# Altium PCB SWG.PcbDoc
Units mm, origin at the board's own origin, x right, y up, seen from the top; angles counter-clockwise.
Board outline 108 x 53 mm, 2 copper layers (Top Layer, Bottom Layer), stack 1.536 mm thick; 36 components, 22 nets, 115 pads, 34 vias.
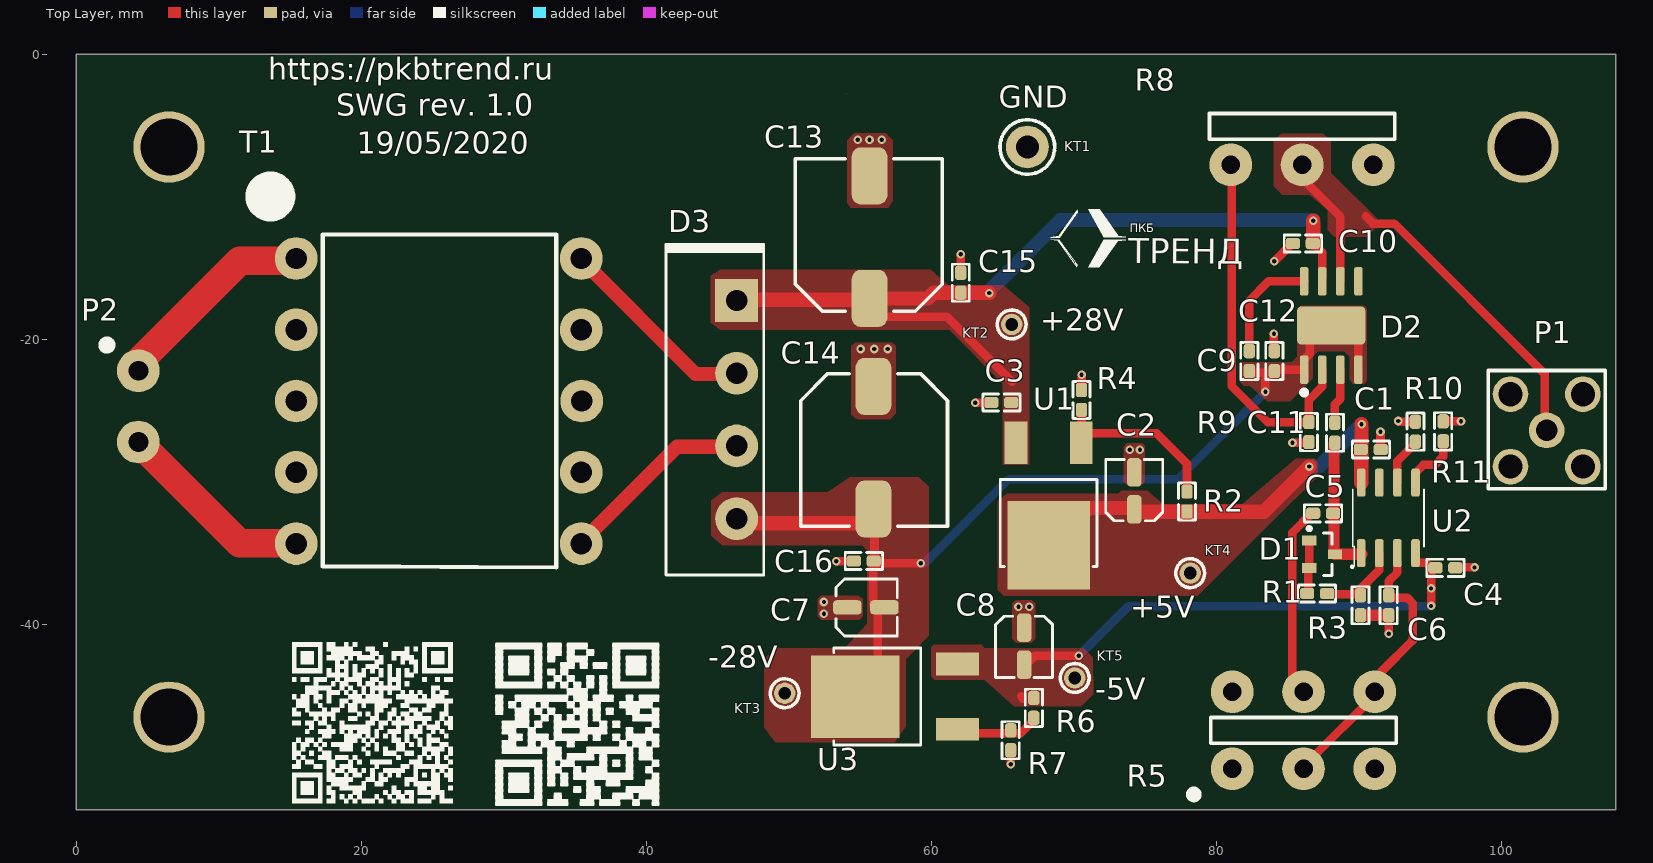
[diagram p0: Top Layer view]
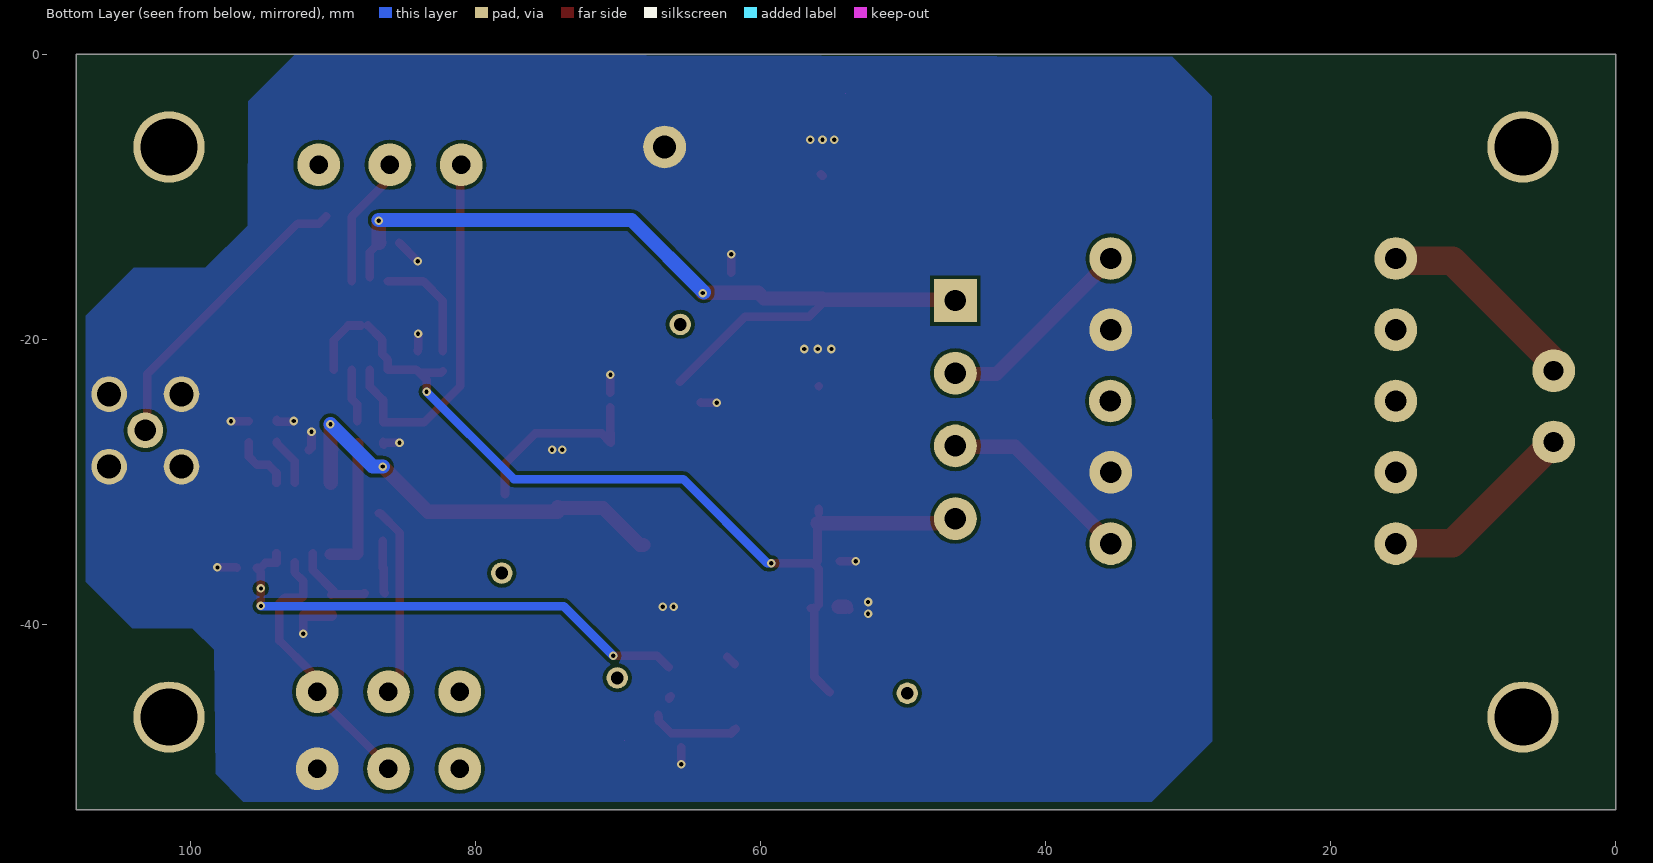
[diagram p1: Bottom Layer view, seen from below]
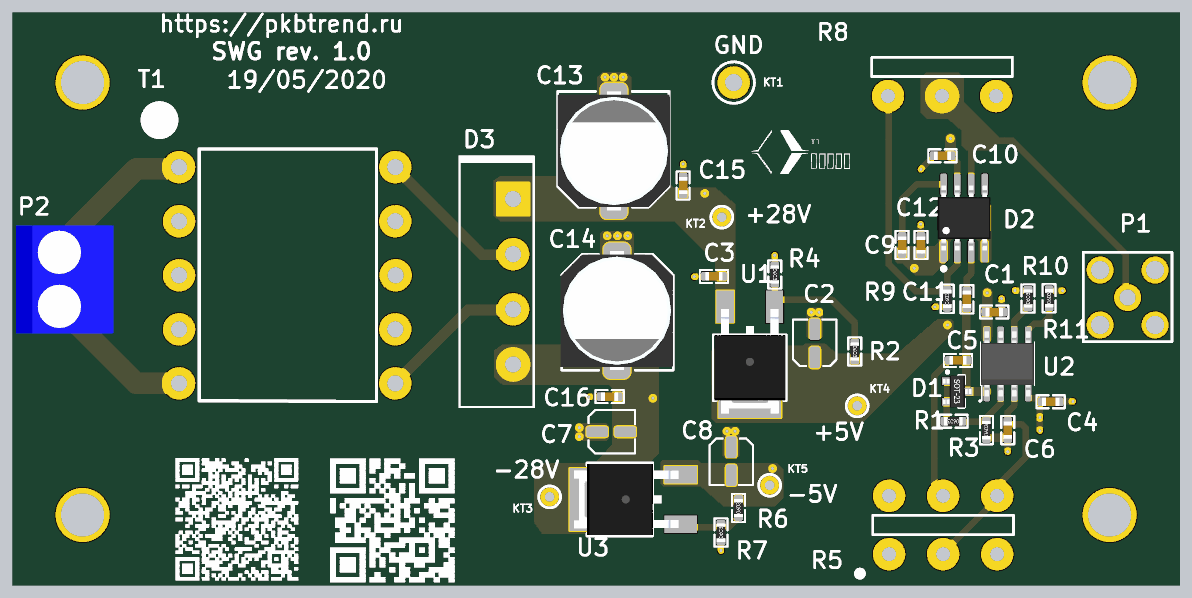
[diagram p2: 3D render of the assembled board from above, using the file's embedded part models]

## Layer stack, top to bottom
Top Solder: solder mask 0.0102, Solder Resist, Dk 3.5
Top Layer: signal copper 0.018
Dielectric 1: dielectric 1.5, FR-4, Dk 4.8
Bottom Layer: signal copper 0.018
Bottom Solder: solder mask 0.0102, Solder Resist, Dk 3.5

## Board outline
108,0 108,-53 0,-53 0,0
cut-out: 54.05,-2.725
cut-out: 69.525,-48.125
cut-out: 129.3,3.9
cut-out: 129.3,3.9
cut-out: 23.3,-66.7

## Design rules (kind name [scope] priority, off if disabled: settings)
Clearance [All] p1: gap=0.254 ignorepadtopadclearanceinfootprint=FALSE
Height [All] p1: minheight=0 maxheight=30 prefheight=12.7
PolygonConnect [All] p1: connectstyle=Direct reliefconductorwidth=0.254 reliefentries=4 polygonreliefangle="90 Angle" airgapwidth=0.254
RoutingVias [All] p1: holewidth=0.3 width=0.6 viastyle="Through Hole" minholewidth=0.3 minwidth=0.6 maxholewidth=0.5 maxwidth=1
SolderMaskExpansion [All] p1: expansion=0.102
Width Width_D3_3 [All] p1: maxlimit=2 minlimit=0.254 preferedwidth=2
Width Width_D3_2 [All] p2: maxlimit=2 minlimit=0.254 preferedwidth=2
Width Width_P2_2 [All] p3: maxlimit=2 minlimit=0.254 preferedwidth=2
Width Width_P2_1 [All] p4: maxlimit=2 minlimit=0.254 preferedwidth=2
Width Width_GND [All] p5: maxlimit=1 minlimit=0.254 preferedwidth=0.6
Width Width_-28 [All] p6: maxlimit=1 minlimit=0.254 preferedwidth=1
Width Width_220VAC [InNet('NetP1_1')] p7: maxlimit=1 minlimit=0.254 preferedwidth=1
Width Width_30VAC [InNet('NetD2_2')] p8: maxlimit=1 minlimit=0.254 preferedwidth=1
Width Width_+28 [InNet('+28V')] p9: maxlimit=1 minlimit=0.254 preferedwidth=1
Width [All] p10: maxlimit=0.6 minlimit=0.254 preferedwidth=0.6
29 further rules are at their usual default settings.

## Components (designator, comment, footprint, x,y, rotation, side; value= is the part's Value field where it differs from the comment)
C1 "0.1uF/50V" C0603 90.825,-27.725 r0 top
C2 "1uF/50V" UCHEMI-CON_CAP0404_RAD 74.225,-30.625 r90 top
C3 "0.1uF/50V" C0603 64.9,-24.425 r0 top
C4 "0.1uF/50V" C0603 96.05,-36.025 r0 top
C5 "0.1uF/50V" C0603 87.475,-32.2 r0 top
C6 "0.1uF/50V" C0603 92.075,-38.65 r90 top
C7 "1uF/50V" UCHEMI-CON_CAP0404_RAD 55.4,-38.8 r0 top
C8 "1uF/50V" UCHEMI-CON_CAP0404_RAD 66.5,-41.525 r270 top
C9 "30pF/50V" C0603 82.3,-21.525 r270 top
C10 "0.1uF/50V" C0603 86.05,-13.275 r180 top
C11 "?F/?V" C0603 88.3,-26.55 r90 top
C12 "0.1uF/50V" C0603 84.05,-21.525 r90 top
C13 "330uF/35V" UCHEMI-CON_CAP1010_RAD 55.65,-12.825 r90 top
C14 "330uF/35V" UCHEMI-CON_CAP1010_RAD 55.925,-27.6 r270 top
C15 "0.1uF/50V" C0603 62.05,-16.025 r90 top
C16 "0.1uF/50V" C0603 55.25,-35.55 r0 top
D1 "BAT54S-E3-08" SOT23-3L 87.4,-35.075 r0 top
D2 "OPA454AIDDA" TI_8SOICPAD 88.045,-19.025 r90 top
D3 "KBU810" KBU8 46.325,-32.575 r90 top
P1 "HYR-1141" SMA 103.16,-26.385 r90 top
P2 "DG300-5.0-02P-12" DG300-5.0-02P-12 4.35,-24.7 r270 top
R1 "2K" R0603 87.05,-37.825 r180 top
R2 "240" R0603 77.925,-31.375 r270 top
R3 "1.2K" R0603 90.1,-38.65 r90 top
R4 "732" R0603 70.525,-24.25 r270 top
R5 "5K" RES_Adj_duble_5K 86.1,-47.425 r0 top
R6 "120" R0603 67.175,-45.85 r90 top
R7 "360" R0603 65.55,-48.125 r90 top
R8 "10K" RES_Adj_10K 86,-5.05 r0 top
R9 "820" R0603 86.475,-26.5 r90 top
R10 "0" R0603 93.95,-26.475 r90 top
R11 "0" R0603 95.9,-26.45 r90 top
T1 "ТПГ-2(2х30В)" "ТПГ-2 (2x30)" 25.425,-24.325 r270 top
U1 "LM317AMDTX/NOPB" SC_TO-252A 68.219,-34.43 r90 top
U2 "AD8092ARZ" AD_SOIC-8_R-8_Rev4 92.05,-32.525 r0 top
U3 "LM337KVURG3" SC_TO-252A 54.64,-45.061 r0 top

## Footprints (in the part's own frame and the unit in brackets; to place one, negate y for a bottom-side part, rotate by r counter-clockwise, add the part's x,y. Pads: shape width x height; smd on the part's side, far side on the other; paste and mask are expansions set on the pad)
AD_SOIC-8_R-8_Rev4 [mm] "Small Outline IC (SOIC), 1.27 mm pitch; 8 pin, 4.90 mm L X 3.90 mm W X 1.75 mm H body"
  rrect50% 0.6x1.97 smd mask+0.05: 1(-1.905,-2.475) 2(-0.635,-2.475) 3(0.635,-2.475) 4(1.905,-2.475) 5(1.905,2.475) 6(0.635,2.475) 7(-0.635,2.475) 8(-1.905,2.475)
  silkscreen extent -2.61,-3.5 2.5,2, body extent -2.45,-3 2.45,3, height 1.75
C0603 [mm] "CHIP Capacitor, 1.6X0.8mm, 0603"
  rrect50% 1x0.8 smd mask+0.075: 1(-0.7,0) 2(0.7,0)
  silkscreen extent -1.33,-0.6 1.32,0.6, body extent -0.8,-0.4 0.8,0.4, height 0.9
DG300-5.0-02P-12 [mm]
  round 3 hole 1.4: 1(-2.5,0) 2(2.5,0)
  silkscreen extent -4.5,-2.4 -4.1,-2, body extent -5,-4 5,5, height 12.6
KBU8 [mm] "KBU8xx diode bridge rectifier"
  rect 3x3 hole 1.5: 1(15.3,0)
  round 3 hole 1.5: 2(10.2,0) 3(5.1,0) 4(0,0)
  silkscreen extent -3.95,-1.9 19.25,4.95, body extent -3.95,-1.9 19.25,4.95, height 17.3
R0603 [mm] "CHIP Resistor 1/10 WATT, 1.6x0.8mm, 0603, 1608"
  rrect50% 1x0.8 smd mask+0.05: 1(-0.7,0) 2(0.7,0)
  silkscreen extent -1.32,-0.6 1.32,0.6, body extent -0.85,-0.4 0.85,0.4, height 0.56
RES_Adj_10K [mm]
  round 3 hole 1.3: 1(-5,-2.7) 2(0,-2.7) 3(5,-2.7)
  silkscreen extent -6.5,-0.9 6.5,0.9, body extent -8.1,-5 8.1,10.6, height 22.2
RES_Adj_duble_5K [mm]
  round 3 hole 1.3: 1(-5,-2.7) 2(0,-2.7) 3(5,-2.7) 4(5,2.7) 5(0,2.7) 6(-5,2.7)
  silkscreen extent -7.9,-4.7 6.5,0.9, body extent -8.4,-11.2 8.4,5.3, height 22.2
SC_TO-252A [mm] "D-PAK"
  rect 3x1.6 smd: 1(7.18,-2.286) 3(7.18,2.286)
  rect 6.2x5.8 smd: 2(0,0)
  silkscreen extent -1.5,-3.4 4.6,3.4, body extent -2.7,-3.29 7,3.29, height 2.3
SMA [mm]
  round 2.5 hole 1.5: 1(0,0)
  round 2.5 hole 1.7: 2(-2.54,-2.54) 2(-2.54,2.54) 2(2.54,-2.54) 2(2.54,2.54)
  silkscreen extent -4.1,-4.1 4.2,4.1
SOT23-3L [mm] "SOT23, 3-Leads, Body 2.9x1.3mm, Pitch 0.95mm, Lead Span 2.5mm, IPC High Density"
  rect 1x0.7 smd: 1(-0.9,0.95) 2(-0.9,-0.95) 3(0.9,0)
  silkscreen extent -1.02,-1.5 0.7,1.92, body extent -1.32,-1.5 1.32,1.5, height 1.08
TI_8SOICPAD [mm]
  rrect50% 2x0.6 smd: 1(-3.1,1.905) 2(-3.1,0.635) 3(-3.1,-0.635) 4(-3.1,-1.905) 5(3.1,-1.905) 6(3.1,-0.635) 7(3.1,0.635) 8(3.1,1.905)
  rrect25% 2.7x4.8 smd: 9(0,0)
  silkscreen extent -4.8,1.8 -4.6,2, body extent -3,-2.45 3,2.45, height 1.75
UCHEMI-CON_CAP0404_RAD [mm]
  rrect50% 2x1 smd: 1(-1.3,0) 2(1.3,0)
  silkscreen extent -2.1,-2 2.2,2, body extent -2.4,-2.2 2.4,2.2, height 5.4
UCHEMI-CON_CAP1010_RAD [mm]
  rrect50% 4x2.5 smd: 1(-4.3,0) 2(4.3,0)
  silkscreen extent -5.2,-5.1 5.5,5.2, body extent -5.5,-5.2 5.5,5.2, height 10.41
"ТПГ-2 (2x30)" [mm]
  round 3 hole 1.5: 1(-10,-10) 2(-5,-10) 3(0,-10) 4(5,-10) 5(10,-10) 6(10,10) 7(5,10) 8(0,10.033) 9(-5,10) 10(-10,10)
  silkscreen extent -14.85,-12.31 11.68,8.26, body extent -16.26,-13.78 16.26,13.78, height 30

## Part data
C1 C3 C4 C6: library part CAP_0603_0.1uF/50V, Manufacturer="Murata Manufacturing", Package=0603, PartNumber=GRM188R71H104KA93D
  C1: N_GROUP=CAP
  C3 C4 C6: Group=CAP
C2 C7 C8: library part CAP_electrolit_1uf, Manufacturer=JB, PartNumber=JCK1H010M040054, Group=CAP
C5 C10 C12 C15 C16: library part CAP_0603_0.1F/50V, Manufacturer="Murata Manufacturing", Package=0603, PartNumber=GRM188R71H104KA93D, Group=CAP
C9: library part CAP_0603_30pF/50V, Manufacturer="Murata Manufacturing", Package=0603, PartNumber=GRM2165C1H300JZ01D, N_GROUP=CAP
C11: library part CAP_0603_?F/?V, Manufacturer="Murata Manufacturing", Package=0603, PartNumber=?, Group=CAP
C13 C14: library part CAP_electrolit_330uf, Manufacturer=JB, PartNumber=JCK1V331M100105, Group=CAP
D1: library part "Diode BAT54S", "Dual Schottky Rectifier, SOT-23, 30V 200mA", Manufacturer=Vishay, Package=SOT23, ComponentLink1Description="Manufacturer Link", ComponentLink1URL=http://www.irf.com/, ComponentLink2Description=Datasheet, ComponentLink2URL=http://www.irf.com/product-info/datasheets/data/10tq.pdf, Group=DIOD, PartNumber=BAT54S-E3-08
D2: library part CH_OPA454AIDDA, "IC OPAMP GP 1 CIRCUIT 8SOPWRPAD", Manufacturer="Texas Instruments", Group=CH, PartNumber=OPA454AIDDA
D3: "KBU8 series bridge single-phase rectifier, 8А, 1000V", Manufacturer=China, PartNumber=KBU810
P1: library part SMA, Manufacturer="New Centress (HOYUTEC)", Group=CON, PartNumber=HYR-1141
P2: Manufacturer="Degson Electronics", Group=CON, PartNumber=DG300-5.0-02P-12
R1: library part RES_0603_2K, Manufacturer=Yageo, Package=0603, PartNumber=RC0603FR-0744K2L, Group=RES
R2: library part RES_0402_240, "RES SMD 240 OHM 1% 1/10W 0603", Manufacturer="Panasonic Electronic Components", Package=0603, PartNumber=ERJ-3EKF2400V, Tolerance=±1%, Group=RES
R3: library part RES_0603_1.2K, Manufacturer=Yageo, Package=0603, PartNumber=RC0603FR-071K2L, Group=RES
R4: library part RES_0402_732, "RES SMD 732 OHM 1% 1/10W 0603", Manufacturer="Panasonic Electronic Components", Package=0603, PartNumber=ERJ-3EKF7320V, Tolerance=±1%, Group=RES
R5: library part RES_Adj_duble_5K, "Dual variable resistor WH148-2, resistance nominal 5kom. Metal handle with a recess for the cap.", Manufacturer=China, PartNumber=WH148-2, Group=RES
R6: library part RES_0402, Manufacturer="Panasonic Electronic Components Panasonic Electronic Components", Package=0603, PartNumber=ERJ-2RKF1200X, Tolerance=±1%, Group=RES, RoHS="ROHS3 Compliant"
R7: library part RES_0402, "RES SMD 360 OHM 1% 1/10W 0603", Manufacturer="Panasonic Electronic Components", Package=0603, PartNumber=ERJ-3EKF3600V, Tolerance=±1%, Group=RES
R8: library part Res_Adj_10K, "Variable Resistor", Manufacturer=China, PartNumber=16K1-10C10K,L15KC, Group=RES
R9: library part RES_0603_820, Manufacturer=Yageo, Package=0603, PartNumber=RC0603FR-07820RL, Group=RES
R10 R11: library part RES_0603_0, Manufacturer=Yageo, Package=0603, PartNumber=RC0603JR-070RL, Group=RES
T1: library part "ТПГ-2 (2x30)", "Sealed transformer", Manufacturer=Комплекс, PartNumber=ТПГ-2(2х30В)
U1: "3-Terminal Adjustable Regulator", Manufacturer="Texas Instruments", Package=TO-252A, ComponentLink1Description="LM317 Datasheet", ComponentLink1URL=http://www.national.com/ds/LM/LM317.pdf, ComponentLink2Description="LM317 Web Page", ComponentLink2URL=http://www.national.com/pf/LM/LM317.html, ComponentLink3Description="T03B Package Page", ComponentLink3URL=http://www.national.com/packaging/folders/t03b.html, PartNumber=LM317AMDTX/NOPB
U2: library part AD8092ARZ_1, Manufacturer="Analog Devices", Group=CH, PartNumber=AD8092ARZ
U3: "3-Terminal Adjustable Negative Regulator", Manufacturer="Texas Instruments", Package=TO-252A, ComponentLink1Description="LM337 Datasheet", ComponentLink1URL=http://www.national.com/ds/LM/LM337.pdf, ComponentLink2Description="LM337 Web Page", ComponentLink2URL=http://www.national.com/pf/LM/LM337.html, ComponentLink3Description="T03B Package Page", ComponentLink3URL=http://www.national.com/packaging/folders/t03b.html, Group=CH, PartNumber=LM337KVURG3

## Free pads (board coordinates)
  round 5 hole 4: 1(6.5,-46.5) 1(6.5,-6.5) 1(101.5,-46.5) 1(101.5,-6.5)
  round 1.5 hole 0.9: 1(49.7,-44.825) 1(65.625,-18.95) 1(70.05,-43.75) 1(78.15,-36.4)
  round 3 hole 1.6: 1(66.725,-6.5)

## Via types
v1: diameter 0.6, hole 0.3, Top Layer to Bottom Layer, 34 vias

## Nets (pads, with @x,y where several pads share a name; then routed paths per layer and width w, separated by ;. In a path a pad name is that pad's centre, name@x,y a point inside that pad or via, vN(x,y) a via of type N, cw(c..) or ccw(c..) an arc to the next point about the centre after c; other vN are vias at no path point)
+5V: C1.1 C2.1 pad.1@78.15,-36.4 R2.2 U1.2 U2.8 | length 30.1
  Top Layer w0.6: C1.1@90.1,-27.7 90.125,-27.7 C1.1@90.145,-27.72
  Top Layer w1: U1.2 68.445,-34.43 71.045,-31.83 C2.1@74.225,-31.83 ; C2.1@74.225,-31.775 C2.1@74.225,-31.83 ; v1(86.5,-28.925) 83.325,-32.1 77.6,-32.1 74.225,-32.1 C2.1 C2.1@74.225,-31.83 ; C1.1@90.1,-27.7 90.175,-27.625 v1(90.175,-25.95) ; U2.8 C1.1@90.145,-27.72
  Bottom Layer w1: v1(86.5,-28.925) 87.2,-28.925 v1(90.175,-25.95)
+28V: C3.2 C10.1 C13.1 C15.1 D2.7 D3.1 pad.1@65.625,-18.95 U1.3 | length 59.6
  Top Layer w0.6: C13.1 55.65,-17.475 56.575,-18.4 61.075,-18.4 65.65,-22.975 ; C10.1 86.75,-13.225 87.4,-13.875 D2.7@87.4,-15.64
  Top Layer w1: D3.1@46.225,-17.375 D3.1 ; D3.1@46.65,-17.225 55.55,-17.225 C13.1 59.75,-17.125 60.15,-16.725 C15.1 64.025,-16.725 v1(64.05,-16.75) ; C10.1@86.75,-13.225 86.775,-13.2 v1(86.775,-11.675)
  Bottom Layer w1: v1@63.988,-16.688 69.05,-11.625 v1@86.775,-11.625
-5V: C4.1 C8.2 pad.1@70.05,-43.75 R6.2 U2.4 U3.3 | length 36.4
  Top Layer w0.6: U3.3 U3.3@62.32,-42.275 ; 66.3,-45.025 66.4,-45.125 66.4,-45.225 ; C8.2@66.45,-43 67.25,-42.2 v1(70.325,-42.2) ; U2.4 93.955,-35.685 94.735,-35.685 95.163,-36.112 95.25,-36.025 C4.1 95.05,-36.325 v1(95.05,-37.475) v1(95.05,-38.7)
  Bottom Layer w0.6: v1(70.325,-42.2) 73.8,-38.725 v1@95.05,-38.725
-28V: C7.2 C9.2 C12.1 C14.2 C16.2 D2.1 D2.4 D2.9 D3.4 pad.1@49.7,-44.825 U3.2 | length 68.6
  Top Layer w0.6: U3.2@55.15,-44.75 56.225,-43.675 56.225,-38.825 56.125,-38.825 55.925,-38.625 55.925,-38.125 55.9,-38.1 55.9,-36.1 C16.2@56.15,-35.85 ; C14.2@55.925,-32.2 C14.2 ; C16.2@56,-35.55 C14.2@56,-32.9 ; C7.2@56.075,-38.85 C7.2@56.475,-38.85 ; C16.2@56.125,-35.7 v1(59.25,-35.7) ; C9.2 82.4,-22.325 83.95,-22.325 C12.1 ; v1(83.425,-23.675) 83.425,-22.85 C12.1 ; D2.1@86.145,-22.125 D2.1 ; D2.9@87.545,-19.025 86.54,-20.03 86.54,-21.025 86.14,-21.425 D2.1 ; D2.9 88.903,-19.025 89.95,-20.072 D2.4 ; C12.1 84.15,-22.125 D2.1
  Top Layer w1: D3.4@46.55,-32.625 46.65,-32.625 46.925,-32.9 C14.2@56,-32.9
  Bottom Layer w0.6: v1(59.25,-35.7) 59.525,-35.7 65.425,-29.8 77.3,-29.8 v1(83.425,-23.675)
Ampli_sin: D2.6 P1.1 R8.2 | length 31.2
  Top Layer w0.6: R8.2@86.241,-7.991 R8.2 ; R8.2@86.5,-7.75 R8.2 ; D2.6 88.68,-11.38 86,-8.7 R8.2 ; 90.475,-11.375 90.975,-11.875 92.476,-11.875 103.01,-22.409 P1.1@103.01,-26.385
GND: C1.2 C2.2 C3.1 C4.2 C6.1 C7.1 C8.1 C10.2 C12.2 C13.2 C14.1 C15.2 C16.1 P1.2 pad.1@66.725,-6.5 R3.1 R4.1 R5.3 R7.1 R9.1 R10.2 R11.2 T1.7 T1.9 | length 20.1
  Top Layer w0.6: v1(53.325,-35.575) C16.1@54.4,-35.575 ; C7.1@53.775,-38.95 C7.1@53.875,-38.85 ; C7.1@54,-38.725 C7.1@54.025,-38.75 ; C13.2 C13.2@55.775,-8.4 ; C14.1@55.9,-23.275 C14.1 ; C15.2 62.05,-15.225 v1(62.05,-14.025) ; v1(63.075,-24.45) 64.175,-24.45 C3.1 ; v1(65.55,-49.8) R7.1@65.55,-48.625 ; R4.1@70.525,-23.75 v1(70.525,-22.475) ; v1(84.025,-19.6) 84.025,-20.7 84.05,-20.725 C12.2 ; v1(84.05,-14.525) C10.2@85.35,-13.225 ; v1(85.325,-27.25) 86.425,-27.25 R9.1 86.475,-27.35 R9.1@86.425,-27.4 ; v1(91.5,-26.475) 91.5,-27.6 91.675,-27.775 91.7,-27.75 C1.2@91.65,-27.7 ; C6.1@91.975,-39.35 92.075,-39.45 v1(92.075,-40.65) ; v1(92.75,-25.725) 92.8,-25.775 R10.2 R10.2@93.95,-25.625 ; R11.2 v1(97.15,-25.75) ; C4.2 96.775,-36 v1(98.1,-36) ; C16.1@54.4,-35.575 54.425,-35.55 54.45,-35.575 C16.1@54.4,-35.575
  Top Layer w0.8: R3.1 C6.1@91.975,-39.35
  Top Layer w1: C7.1@54.025,-38.75 C7.1@54.525,-38.75
  other v1: 52.45,-39.25 66.1,-38.75 66.85,-38.75 52.45,-38.425 73.9,-27.75 74.625,-27.75 55.025,-20.675 55.975,-20.675 56.925,-20.675 54.825,-6 55.65,-6 56.5,-6
NetC5_1: C5.1 R5.5 | length 13.5
  Top Layer w0.6: R5.5 85.296,-43.921 85.296,-33.579 86.675,-32.2 C5.1
NetC6_2: C6.2 R5.2 R5.4 U2.3 | length 19.3
  Top Layer w0.6: R5.2@86.6,-49.55 86.6,-49.475 R5.4@91.075,-45 ; R5.4@91.075,-44.9 R5.4@91.075,-45 ; R5.4@91.1,-45.15 R5.4@91.1,-44.925 ; R5.4 91.559,-44.266 91.559,-43.316 93.75,-41.125 93.75,-38.5 93.375,-38.125 92.175,-38.125 92.075,-38.025 C6.2 92.075,-37.85 92.075,-36.96 92.685,-36.35 U2.3@92.685,-35.65 ; R5.4@91.6,-44.475 R5.4@91.075,-45
NetC9_1: C9.1 D2.8 | length 8
  Top Layer w0.6: C9.1 82.3,-17.275 83.65,-15.925 D2.8@86.145,-15.925
NetC11_2: C11.2 D2.3 | length 3.8
  Top Layer w0.6: C11.2@88.3,-25.75 88.3,-24.55 88.685,-24.165 D2.3@88.685,-22.125
NetD1_1: D1.1 D1.2 R1.2 | length 3.8
  Top Layer w0.6: R1.2 86.425,-37.75 86.425,-36.075 86.475,-36.025 D1.2 D1.1
NetD2_2: D2.2 R8.1 R9.2 | length 26.1
  Top Layer w0.6: R8.1@81.05,-7.775 81.05,-23.275 83.6,-25.825 86.475,-25.825 86.475,-24.25 87.415,-23.31 D2.2@87.415,-22.125
NetD3_2: D3.2 T1.10 | length 14.6
  Top Layer w1: T1.10@35.35,-14.325 43.45,-22.425 D3.2@46.55,-22.425
NetD3_3: D3.3 T1.6 | length 14
  Top Layer w1: T1.6@35.35,-34.325 42.15,-27.525 D3.3@46.55,-27.525
NetP2_1: P2.1 T1.1 | length 14.8
  Top Layer w2: P2.1 4.35,-21.6 11.463,-14.487 15.187,-14.487 T1.1@15.375,-14.3 ; T1.1@15.275,-14.4 T1.1@15.35,-14.325
NetP2_2: P2.2 T1.5 | length 14
  Top Layer w2: P2.2 11.45,-34.3 T1.5@15.375,-34.3
NetR1_1: R1.1 R3.2 U2.2 | length 6.1
  Top Layer w0.6: R1.1@87.85,-37.825 R1.1 87.8,-37.875 R3.2@90.05,-37.875 ; R3.2@90.1,-37.925 R3.2@90.05,-37.875 ; U2.2 91.415,-36.185 89.9,-37.7 89.9,-37.725 R3.2@90.05,-37.875
NetR2_1: R2.1 R4.2 U1.1 | length 13.2
  Top Layer w0.6: R4.2@70.525,-24.825 70.525,-26.52 70.528,-26.522 70.505,-26.545 U1.1 71.156,-26.6 75.8,-26.6 77.925,-28.725 R2.1@77.925,-30.875 ; R4.2@70.525,-24.825 R4.2@70.525,-24.75
NetR6_1: R6.1 R7.2 U3.1 | length 6.7
  Top Layer w0.6: U3.1@61.725,-47.322 U3.1@62.053,-47.65 ; U3.1 62.098,-47.625 66.225,-47.625 66.275,-47.625 67.124,-46.776 67.124,-46.476 67.175,-46.425 R6.1@67.175,-46.35
NetR10_1: R10.1 U2.6 | length 3.4
  Top Layer w0.6: U2.6 92.685,-28.54 93.95,-27.275 R10.1
NetR11_1: R11.1 U2.5 | length 4.1
  Top Layer w0.6: U2.5 93.955,-29.365 94.51,-28.81 95.315,-28.81 95.9,-28.225 R11.1@95.9,-27.225
sin: C5.2 C11.1 D1.3 U2.1 | length 10
  Top Layer w0.6: D1.3@88.238,-35.025 88.288,-35.075 D1.3 ; C5.2@88.238,-32.263 C5.2 C5.2@88.238,-32.138 ; C11.1@88.238,-27.313 C11.1 ; U2.1 90.2,-35 90.225,-35.025 U2.1@90.175,-35.075
  Top Layer w0.8: D1.3@88.238,-35.025 C5.2@88.238,-32.263 ; C5.2@88.238,-32.138 C11.1@88.238,-27.313 ; D1.3 U2.1@90.175,-35.075
pads on no net: D2.5 R5.1 R5.6 R8.3 T1.2 T1.3 T1.4 T1.8 U2.7

## Polygon pours and split planes (outlines as drawn)
no net on PCB Сutout (solid): 94.8,-30.225
Ampli_sin on Top Layer "GND" (solid, pour order 78): 84.525,-5.575 87.5,-5.575 88.025,-6.1 88.025,-8.3 91.275,-11.55 91.275,-12.075 90.55,-12.8 88.25,-12.8 87.8,-12.35 87.8,-10.95 86.525,-9.85 84.6,-9.85 84,-9.25 84,-6.1
+5V on Top Layer "+5V" (solid, pour order 76): 64.637,-31.35 64.662,-37.578 65.084,-38 78.675,-38 83.875,-32.8 87.05,-29.625 87.05,-28.575 86.862,-28.387 85.544,-28.387 81.817,-31.575 76.275,-31.575 75.15,-30.625 73.3,-30.625 73.1,-30.825 65.294,-30.825
no net on Top Layer "GND" (solid, pour order 74): 67.45,-41.975
no net on Top Layer "GND" (solid, pour order 72): 67.45,-41.775
-5V on Top Layer "-5V" (solid, pour order 70): 70.5,-45.725 67,-45.725 65.8,-45.725 63.689,-43.875 60.2,-43.875 59.975,-43.65 59.975,-41.6 60.15,-41.425 63.475,-41.425 63.725,-41.675 65.875,-41.675 70.675,-41.675 71.315,-42.315 71.333,-44.892
GND on Top Layer "GND" (solid, pour order 68): 54.326,-10.75 54.075,-10.425 54.075,-6.012 54.562,-5.525 56.775,-5.525 57.262,-6.013 57.262,-10.275 56.95,-10.75
GND on Top Layer "GND" (solid, pour order 66): 52.025,-38.212 52.237,-38 54.9,-38 55.175,-38.229 55.175,-39.425 54.925,-39.675 52.263,-39.675 52.025,-39.438
GND on Top Layer "GND" (solid, pour order 64): 54.375,-20.459 54.636,-20.225 57.239,-20.225 57.5,-20.459 57.5,-25.168 57.1,-25.6 54.775,-25.6 54.375,-25.279
GND on Top Layer "GND" (solid, pour order 62): 73.475,-27.525 73.7,-27.3 74.8,-27.3 74.975,-27.475 74.975,-29.975 74.725,-30.225 73.725,-30.225 73.475,-29.975
GND on Top Layer "GND" (solid, pour order 60): 65.675,-38.525 65.9,-38.3 67.036,-38.3 67.275,-38.515 67.275,-41.011 66.99,-41.275 65.95,-41.275 65.675,-41
no net on Top Layer "GND" (solid, pour order 58): 64.45,-48.1
-28V on Top Layer "-28V" (solid, pour order 54): 81.7,-21.725 81.825,-21.6 85.275,-21.6 85.65,-21.225 85.65,-17.875 85.9,-17.625 90.35,-17.625 90.55,-17.825 90.55,-22.925 90.35,-23.125 89.55,-23.125 89.35,-22.825 89.35,-21.225 88.95,-20.825 87.15,-20.825 86.75,-21.225 86.75,-22.725 85.15,-24.351 85.124,-24.325 84.575,-24.325 83.55,-24.325 82.325,-23.25 81.9,-23.25 81.7,-23.05
+28V on Top Layer "+28V" (solid, pour order 52): 44.5,-15.548 45.175,-15.125 59.938,-15.125 61.169,-16.209 65.039,-16.209 66.871,-17.742 66.871,-28.8 64.996,-28.8 64.996,-23.096 61.233,-19.334 45.175,-19.334 44.5,-18.822
-28V on Top Layer "-28V" (solid, pour order 48): 44.563,-31.273 45.335,-30.725 52.674,-30.725 54.275,-29.671 59.121,-29.671 59.8,-30.35 59.8,-38.675 59.8,-40.8 58.175,-42.425 58.175,-47.126 57.426,-48.275 49.019,-48.275 48.275,-47.205 48.275,-42.417 49.164,-41.675 53.925,-41.675 55.475,-39.967 55.475,-34.8 55.15,-34.458 45.335,-34.458 44.563,-33.759
no net on Top Layer "+5V" (solid, pour order 40): 3.05,-37.625
GND on Bottom Layer "GND" (solid, pour order 44): 31.118,-0.157 92.625,0 95.925,-3.3 95.987,-12.013 98.938,-14.963 103.963,-14.963 107.325,-18.325 107.325,-37 104.075,-40.25 99.85,-40.25 98.315,-41.785 98.217,-50.486 96.277,-52.426 32.55,-52.425 28.302,-48.177 28.35,-2.925
no net on Bottom Layer "GND" (solid, pour order 46): 79.8,-66.6

## Silkscreen, mask and mechanical layers (free items; w line width, h text height)
Top Overlay:
  drawing of 3111 lines, arcs and shapes, not listed
  text "https://pkbtrend.ru" at 13.45,-1.775 h1.52
  text "GND" at 64.7,-3.75 h1.52
  text "SWG rev. 1.0" at 18.225,-4.325 h1.52
  text "KT1" at 69.325,-6.8 h0.7
  text "19/05/2020" at 19.675,-6.975 h1.52
  text "ПКБ" at 73.896,-12.704 h1
  text "ТРЕНД" at 73.797,-15.259 h3 r359.62
  text "+28V" at 67.625,-19.4 h1.52
  text "KT2" at 62.15,-19.875 h0.7
  text "KT4" at 79.175,-35.15 h0.7
  text "+5V" at 73.95,-39.525 h1.52
  text "KT5" at 71.6,-42.55 h0.7
  text "-28V" at 44.325,-43.025 h1.52
  text "-5V" at 71.5,-45.275 h1.52
  text "KT3" at 46.15,-46.225 h0.7
PCB Сutout:
  lines w0.254: 0,-53.025 108,-53.025 108,0 0,0 0,-52.796 0,-53.025

## Dimensions
0,0 to 0,-53 on Information
108,0 to 0,0 on Information